# EAGLE board Relay_orig (EAGLE 9.1.2)
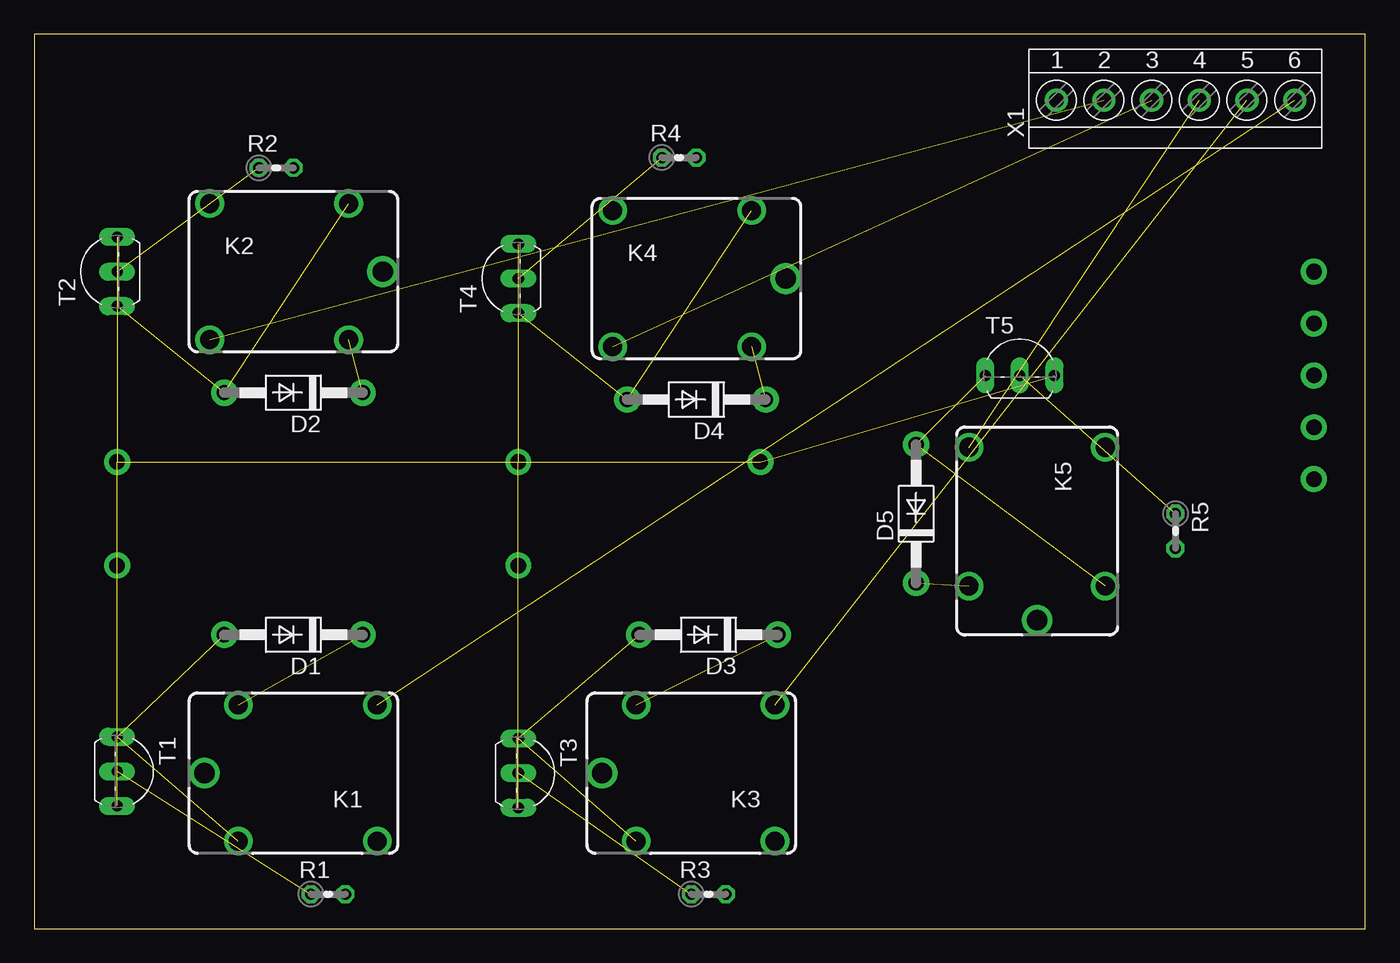
[diagram p0: board, top side]

Size 97.77 x 65.71 mm. Coordinates in mm from the lower left corner, seen from the top.
Outline: 0,0 97.77,0 97.77,65.71 0,65.71 0,0
Copper layers (1*16): Top 0.035mm / dielectric 1.5mm / Bottom 0.035mm
Design rules "default": minimum track width 6mil, minimum drill 0.35mm, track to track 6mil, track to pad 6mil, pad to pad 6mil, via to via 6mil, smd to smd 6mil, copper to edge 40mil, drill to drill 6mil, minimum pad ring 10mil, minimum via ring 8mil, stop-mask expansion 4mil, vias tented up to drill 0mil, thermal gap 10mil
Net classes: 1 Power: width 0.762 mm, drill 0.762 mm, clearance 0.635 mm; 2 Data: width 0.762 mm, drill 0.762 mm, clearance 0.635 mm

## Footprints (pad centres in the part's own frame; a part is rotated, then mirrored left to right if it is on the bottom)
DO41-10 = drill 1.118 pad 1.93: A 5.08,0; C -5.08,0
JJM = drill 1.4: 1 4.05,5; 2 4.05,-5; NO1 -6.15,5; NO2 -6.15,-5 | drill 1.5: C 6.55,0
0204V = drill 0.813 octagon: 1 -1.27,0; 2 1.27,0
TO92-EBC-OVAL = drill 0.813 long: B 0,-1.27; C 2.54,-1.27; E -2.54,-1.27
TERMINAL-BLOCK-6-PIN-3.5MM-ROUND-PAD = drill 1.1 pad 1.7: 1 -8.75,-0.1; 2 -5.25,-0.1; 3 -1.75,-0.1; 4 1.75,-0.1; 5 5.25,-0.1; 6 8.75,-0.1

## Placement (x,y rotation side)
D1  1N4004  [DO41-10]  19.05,21.59 180 top
D2  1N4004  [DO41-10]  19.05,39.37 180 top
D3  1N4004  [DO41-10]  49.53,21.59 180 top
D4  1N4004  [DO41-10]  48.64,38.86 180 top
D5  1N4004  [DO41-10]  64.77,30.48 90 top
K1  JJM2W-5V  [JJM]  19.05,11.43 180 top
K2  JJM2W-5V  [JJM]  19.05,48.26 0 top
K3  JJM2W-5V  [JJM]  48.26,11.43 180 top
K4  JJM2W-5V  [JJM]  48.64,47.75 0 top
K5  JJM2W-5V  [JJM]  73.66,29.21 270 top
R1  [0204V]  21.59,2.54 0 top
R2  [0204V]  17.78,55.88 0 top
R3  [0204V]  49.53,2.54 0 top
R4  [0204V]  47.37,56.64 0 top
R5  [0204V]  83.82,29.21 270 top
T1  2N2222  [TO92-EBC-OVAL]  7.37,11.56 270 top
T2  2N2222  [TO92-EBC-OVAL]  4.83,48.26 90 top
T3  2N2222  [TO92-EBC-OVAL]  36.83,11.43 270 top
T4  2N2222  [TO92-EBC-OVAL]  34.29,47.75 90 top
T5  2N2222  [TO92-EBC-OVAL]  72.39,41.91 0 top
X1  TERMINAL-BLOCK-3.5MM-6-PIN-ROUND-PAD  [TERMINAL-BLOCK-6-PIN-3.5MM-ROUND-PAD]  83.82,60.96 0 top

## Library data of the parts
D1-D5 R1-R5 T1-T5 = adafruit
K1-K5 = relay; OC_FARNELL: unknown; OC_NEWARK: unknown
X1 = Rembrandt Electronics - Terminal Block 3-5mm v1-0

## Nets
GND [Power]: T1.C T2.C T3.C T4.C T5.C
N$1 [Data]: D1.A K1.1 T1.E
N$2 [Data]: R1.1 T1.B
N$3: D2.A K2.1 T2.E
N$4: R3.1 T3.B
N$5: R2.1 T2.B
N$6: D2.C K2.2
N$7 [Power]: D1.C K1.2
N$8: D3.C K3.2
N$9: D3.A K3.1 T3.E
N$10: D4.C K4.2
N$11: D4.A K4.1 T4.E
N$12: R4.1 T4.B
N$13: R1.2
N$14: R5.1 T5.B
N$15: D5.C K5.2
N$16: D5.A K5.1 T5.E
N$26: K5.NO2 X1.4
N$27: K3.NO2 X1.5
N$28: K1.NO2 X1.6
N$29: K4.NO2 X1.3
N$31: K2.NO2 X1.2
VCCA: X1.1

## Tracks (layer width: path | path; a pad name or v marks a point on that pad's centre or on a via)
GND  (via drill 1.14 pad 1.91)  (9 unrouted)
  other vias: 6.1,26.67 6.1,34.29 35.56,26.67 35.56,34.29 53.34,34.29
N$1  (2 unrouted)
N$2  (1 unrouted)
N$3  (2 unrouted)
N$4  (1 unrouted)
N$5  (1 unrouted)
N$6  (1 unrouted)
N$7  (1 unrouted)
N$8  (1 unrouted)
N$9  (2 unrouted)
N$10  (1 unrouted)
N$11  (2 unrouted)
N$12  (1 unrouted)
N$14  (1 unrouted)
N$15  (1 unrouted)
N$16  (2 unrouted)
N$21  (via drill 1.14 pad 1.91)
  other vias: 93.98,33.02
N$22  (via drill 1.14 pad 1.91)
  other vias: 93.98,36.83
N$23  (via drill 1.14 pad 1.91)
  other vias: 93.98,40.64
N$24  (via drill 1.14 pad 1.91)
  other vias: 93.98,44.45
N$25  (via drill 1.14 pad 1.91)
  other vias: 93.98,48.26
N$26  (1 unrouted)
N$27  (1 unrouted)
N$28  (1 unrouted)
N$29  (1 unrouted)
N$31  (1 unrouted)